# Altium PCB print.PcbDoc
Units mil, origin at the board's own origin, x right, y up, seen from the top; angles counter-clockwise.
Board outline 6000 x 4000 mil, 2 copper layers (Top Layer, Bottom Layer); 58 components, 0 nets, 188 pads, 0 vias.
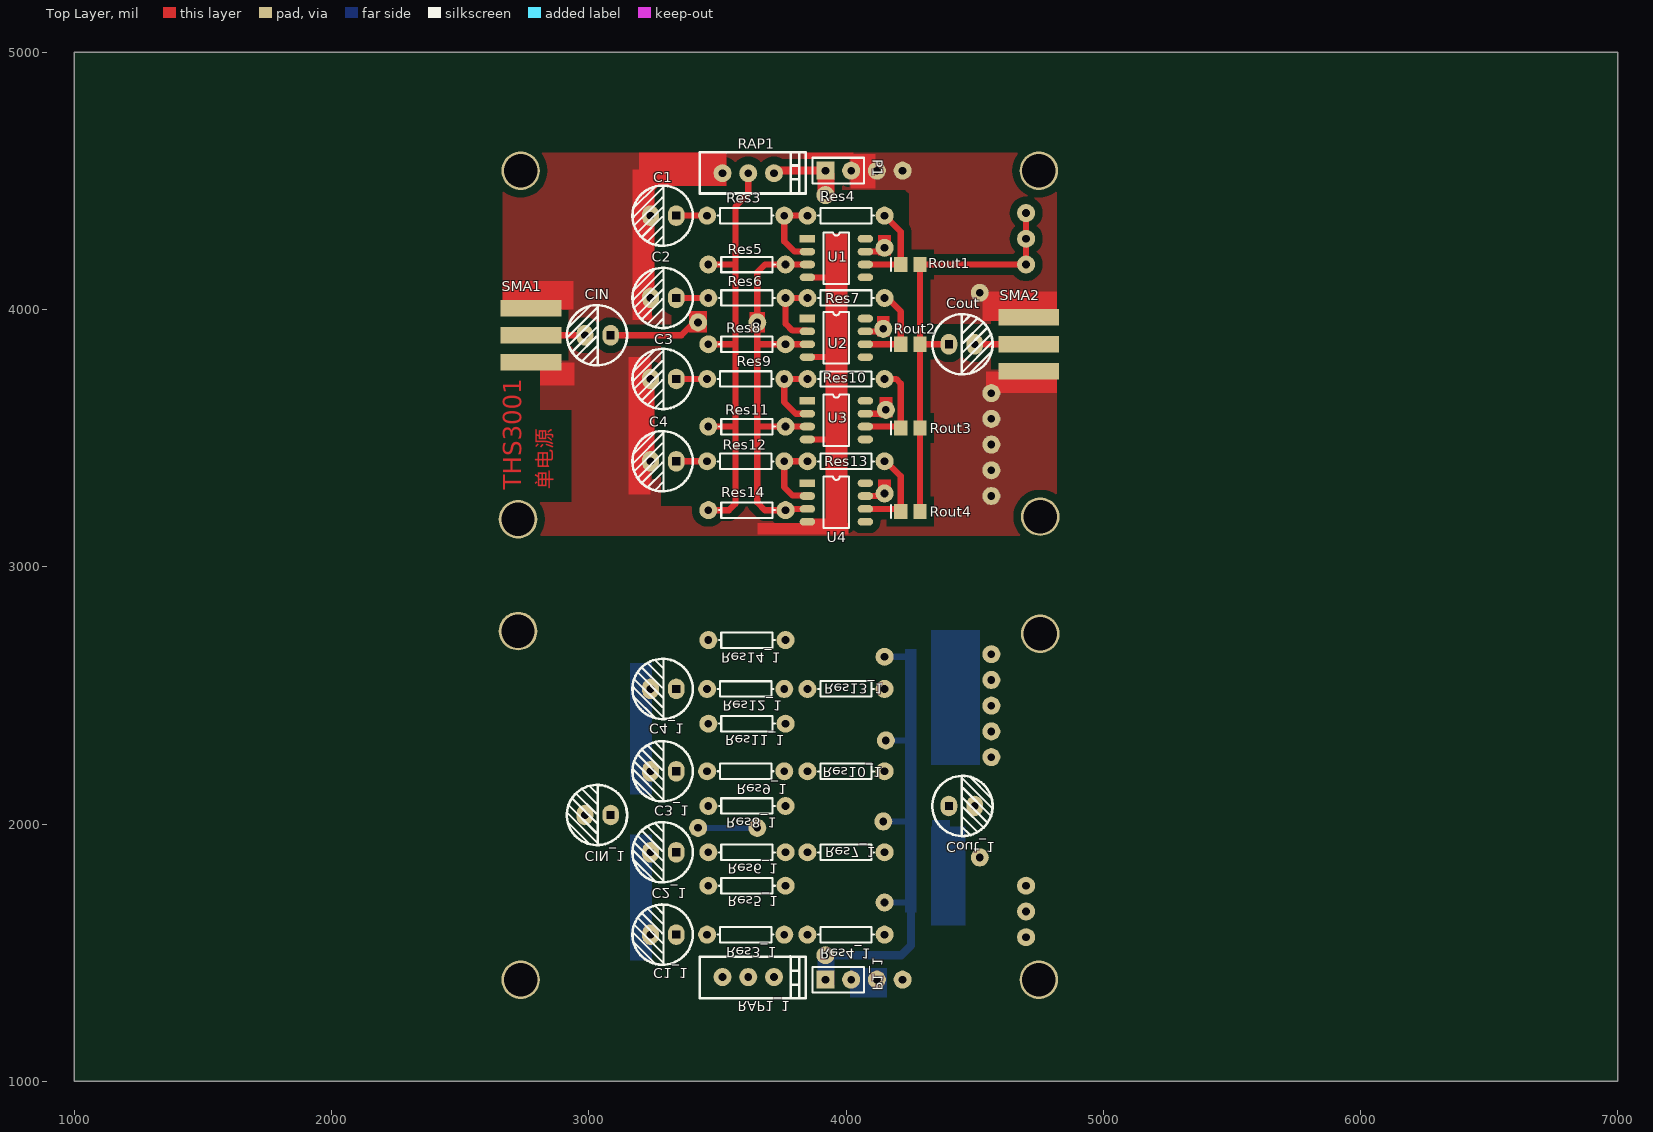
[diagram p0: Top Layer view]
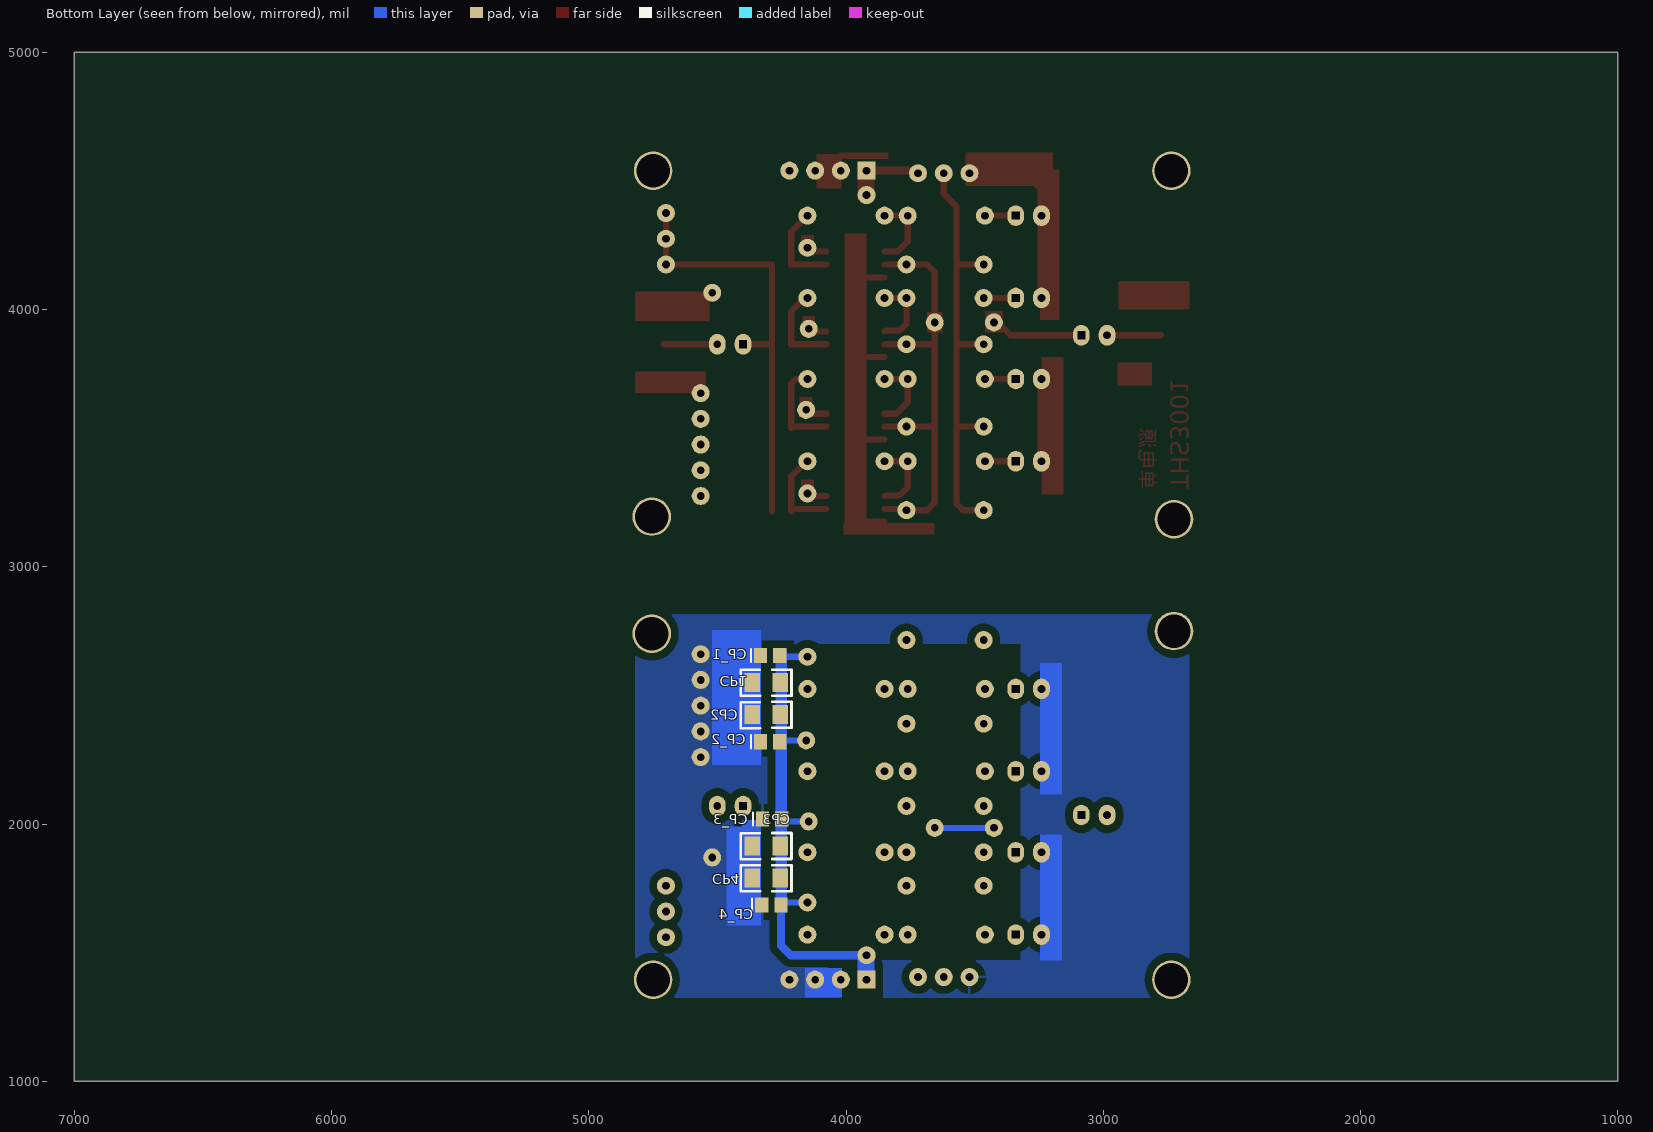
[diagram p1: Bottom Layer view, seen from below]

## Layer stack, top to bottom
Top Layer: signal copper 1.4
Dielectric: dielectric 12.6, FR-4, Dk 4.8
Bottom Layer: signal copper 1.4

## Board outline
1000,1000 7000,1000 7000,5000 1000,5000

## Design rules (kind name [scope] priority, off if disabled: settings)
Clearance [All] p1: gap=10
PolygonConnect [All] p1: connectstyle=Relief reliefconductorwidth=10 reliefentries=4 polygonreliefangle="90 Angle"
RoutingVias [All] p1: holewidth=28 width=50 viastyle="Through Hole" minholewidth=28 minwidth=50 maxholewidth=28 maxwidth=50
SilkscreenOverComponentPads [All] p1: minsilkscreentomaskgap=10
SolderMaskExpansion [All] p1: expansion=4
TestPointUsage [All] p1: valid=0 allowmultiple=FALSE
Testpoint [All] p1: side=15 testpointundercomponent=TRUE minsize=40 maxsize=100 preferedsize=60 minholesize=0 maxholesize=40 preferedholesize=32 testpointgrid=1 style=1023 order=0123456789
Width [All] p1: maxlimit=10 minlimit=10 preferedwidth=10
23 further rules are at their usual default settings.

## Components (designator, comment, footprint, x,y, rotation, side; value= is the part's Value field where it differs from the comment)
C1 "Cap Pol1" CAP1 3340,4365 r180 top
C1_1 "Cap Pol1" CAP1 3340,1570 r180 top (schematic designator C1)
C2 "Cap Pol1" CAP1 3340,4045 r180 top
C2_1 "Cap Pol1" CAP1 3340,1890 r180 top (schematic designator C2)
C3 "Cap Pol1" CAP1 3340,3730 r180 top
C3_1 "Cap Pol1" CAP1 3340,2205 r180 top (schematic designator C3)
C4 "Cap Pol1" CAP1 3340,3410 r180 top
C4_1 "Cap Pol1" CAP1 3340,2525 r180 top (schematic designator C4)
CIN "Cap Pol1" CAP1 3085,3900 r180 top
CIN_1 "Cap Pol1" CAP1 3085,2035 r180 top (schematic designator CIN)
Cout "Cap Pol1" CAP1 4400,3865 r0 top
Cout_1 "Cap Pol1" CAP1 4400,2070 r0 top (schematic designator Cout)
CP1 "Cap Pol1" CAP_BTAN 4255,2550 r0 bottom
CP2 "Cap Pol1" CAP_BTAN 4255,2425 r0 bottom
CP3 "Cap Pol1" CAP_BTAN 4255,1915 r0 bottom
CP4 "Cap Pol1" CAP_BTAN 4255,1790 r0 bottom
CP_1 "cap" C0805 4295,2655 r180 bottom
CP_2 "cap" C0805 4295,2320 r180 bottom
CP_3 "cap" C0805 4287.4,2020 r180 bottom
CP_4 "cap" C0805 4290,1685 r180 bottom
P1 "Header 2" HDR1X2 3920,4540 r0 top
P1_1 "Header 2" HDR1X2 3920,1395 r0 top (schematic designator P1)
RAP1 "RP1" dianweiqi#1 3720,4530 r270 top (schematic designator *)
RAP1_1 "RP1" dianweiqi#2 3720,1405 r90 top (schematic designator *)
Res3 "Res" R-AXIAL0.3 3760,4365 r180 top
Res3_1 "Res" R-AXIAL0.3 3760,1570 r180 top (schematic designator Res3)
Res4 "Res" AXIAL-0.3 4000,4365 r180 top
Res4_1 "Res" AXIAL-0.3 4000,1570 r180 top (schematic designator Res4)
Res5 "Res" R-AXIAL0.3 3465,4175 r0 top
Res5_1 "Res" R-AXIAL0.3 3465,1760 r0 top (schematic designator Res5)
Res6 "Res" R-AXIAL0.3 3465,4045 r0 top
Res6_1 "Res" R-AXIAL0.3 3465,1890 r0 top (schematic designator Res6)
Res7 "Res" AXIAL-0.3 4000,4045 r0 top
Res7_1 "Res" AXIAL-0.3 4000,1890 r0 top (schematic designator Res7)
Res8 "Res" R-AXIAL0.3 3465,3865 r0 top
Res8_1 "Res" R-AXIAL0.3 3465,2070 r0 top (schematic designator Res8)
Res9 "Res" R-AXIAL0.3 3460,3730 r0 top
Res9_1 "Res" R-AXIAL0.3 3460,2205 r0 top (schematic designator Res9)
Res10 "Res" AXIAL-0.3 4000,3730 r0 top
Res10_1 "Res" AXIAL-0.3 4000,2205 r0 top (schematic designator Res10)
Res11 "Res" R-AXIAL0.3 3465,3545 r0 top
Res11_1 "Res" R-AXIAL0.3 3465,2390 r0 top (schematic designator Res11)
Res12 "Res" R-AXIAL0.3 3460,3410 r0 top
Res12_1 "Res" R-AXIAL0.3 3460,2525 r0 top (schematic designator Res12)
Res13 "Res" AXIAL-0.3 4000,3410 r0 top
Res13_1 "Res" AXIAL-0.3 4000,2525 r0 top (schematic designator Res13)
Res14 "Res" R-AXIAL0.3 3465,3220 r0 top
Res14_1 "Res" R-AXIAL0.3 3465,2715 r0 top (schematic designator Res14)
Rout1 "Res" C0805 4250,4175 r0 top
Rout2 "Res" C0805 4250,3865 r0 top
Rout3 "Res" C0805 4250,3540 r0 top
Rout4 "Res" C0805 4250,3215 r0 top
SMA1 "SMA-xie" sma-xie 2675,3985 r0 top
SMA2 "SMA-xie" sma-xie 4610,3950 r0 top
U1 "THS3091" SOIC-8D 3850,4275 r0 top
U2 "THS3091" SOIC-8D 3850,3965 r0 top
U3 "THS3091" SOIC-8D 3850,3645 r0 top
U4 "THS3091" SOIC-8D 3850,3325 r0 top

## Footprints (in the part's own frame and the unit in brackets; to place one, negate y for a bottom-side part, rotate by r counter-clockwise, add the part's x,y. Pads: shape width x height; smd on the part's side, far side on the other; paste and mask are expansions set on the pad)
AXIAL-0.3 [mil] "Resistor; 2 Leads"
  round 70 hole 30: 1(-150,0) 2(150,0)
  silkscreen extent -109,-30 109,30
C0805 [mm] "Chip Capacitor; Body 2.0 x 1.2 mm (LxW typ)"
  rect 1.3x1.5 smd: 1(-0.95,0) 2(0.95,0)
  silkscreen extent -1.9,-0.65 -1.9,0.65
CAP1 [mil] "占地1*2的电容或器件均可以用它"
  oval 65x80 hole 30 square: 1(0,0)
  oval 65x80 hole 30: 2(100,0)
  silkscreen extent -64,-117 170,117
CAP_BTAN [mil]
  rect 60x74 smd: 1(0,0) 2(110,0)
  silkscreen extent -43,-50 154,52
dianweiqi#1 [mil]
  round 70 hole 30: 1(0,0) 2(0,-100) 3(0,-200)
  silkscreen extent -82,-288 80,124
dianweiqi#2 [mil]
  round 70 hole 30: 1(0,0) 2(0,100) 3(0,200)
  silkscreen extent -82,-124 80,288
HDR1X2 [mil] "Connector; Header; 2 Position"
  rect 70x70 hole 30: 1(0,0)
  round 70 hole 30: 2(100,0)
  silkscreen extent -50,-50 150,50
R-AXIAL0.3 [mil]
  round 70 hole 30: 1(0,0) 2(300,0)
  silkscreen extent 41,-30 259,30
sma-xie [mm] "SMA接头外螺内孔，斜四角"
  rect 6x1.6 smd: 1(2.54,0.508) 2(2.54,-2.159) 3(2.54,-4.826)
SOIC-8D [mm] "封装代码为D"
  rect 1.52x0.76 smd: 1(0,0)
  oval 1.52x0.76 smd: 2(0,-1.27) 3(0,-2.54) 4(0,-3.81) 5(5.72,-3.81) 6(5.72,-2.54) 7(5.72,-1.27) 8(5.72,0)
  silkscreen extent 1.59,-4.44 4.13,0.64

## Part data
C1 C1_1 C2 C2_1 C3 C3_1 C4 C4_1 CIN CIN_1 Cout Cout_1 CP1 CP2 CP3 CP4: "Polarized Capacitor (Radial)"
CP_1 CP_2 CP_3 CP_4: "贴片电容"
P1 P1_1: "Header, 2-Pin"
Res3 Res3_1 Res4 Res4_1 Res5 Res5_1 Res6 Res6_1 Res7 Res7_1 Res8 Res8_1 Res9 Res9_1 Res10 Res10_1 Res11 Res11_1 Res12 Res12_1 Res13 Res13_1 Res14 Res14_1 Rout1 Rout2 Rout3 Rout4: "适用于0805的贴片元件，包括磁珠"
SMA1 SMA2: "外螺内孔，斜角，或直四角斜着放置"
U1 U2 U3 U4: "单路高压低失真电流反馈 运放 ,通常申请DDA，即下方带有热焊盘的，有利于散热"

## Free pads (board coordinates)
  round 70 hole 30: 1(4145,2010) 1(4145,3925) 2(4150,1695) 2(4150,4240) 3(4155,2325) 3(4155,3610) 4(4150,2650) 4(4150,3285) 5(3425,1985) 5(3425,3950) 6(3655,1985) 6(3655,3950) 8(3920,1490) 8(3920,4445) 14(4700,1760) 14(4700,4175) 15(4700,1660) 15(4700,4275) 16(4700,1560) 16(4700,4375) 17(4565,2260) 17(4565,3675) 18(4565,2360) 18(4565,3575) 19(4565,2460) 19(4565,3475) 20(4565,2560) 20(4565,3375) 21(4565,2660) 21(4565,3275) 22(4520,1870) 22(4520,4065) 23(4120,1395) 23(4120,4540) 24(4220,1395) 24(4220,4540)
  round 150 hole 130: 7(2725,2750) 7(2725,3185) 7(2735,1395) 7(2735,4540) 7(4750,1395) 7(4750,4540) 7(4755,2740) 7(4755,3195)

## Nets (pads, with @x,y where several pads share a name; then routed paths per layer and width w, separated by ;. In a path a pad name is that pad's centre, name@x,y a point inside that pad or via, vN(x,y) a via of type N, cw(c..) or ccw(c..) an arc to the next point about the centre after c; other vN are vias at no path point)
pads on no net: C1.1 C1.2 C1_1.1 C1_1.2 C2.1 C2.2 C2_1.1 C2_1.2 C3.1 C3.2 C3_1.1 C3_1.2 C4.1 C4.2 C4_1.1 C4_1.2 CIN.1 CIN.2 CIN_1.1 CIN_1.2 Cout.1 Cout.2 Cout_1.1 Cout_1.2 CP1.1 CP1.2 CP2.1 CP2.2 CP3.1 CP3.2 CP4.1 CP4.2 CP_1.1 CP_1.2 CP_2.1 CP_2.2 CP_3.1 CP_3.2 CP_4.1 CP_4.2 P1.1 P1.2 P1_1.1 P1_1.2 RAP1.1 RAP1.2 RAP1.3 RAP1_1.1 RAP1_1.2 RAP1_1.3 Res3.1 Res3.2 Res3_1.1 Res3_1.2 Res4.1 Res4.2 Res4_1.1 Res4_1.2 Res5.1 Res5.2 Res5_1.1 Res5_1.2 Res6.1 Res6.2 Res6_1.1 Res6_1.2 Res7.1 Res7.2 Res7_1.1 Res7_1.2 Res8.1 Res8.2 Res8_1.1 Res8_1.2 Res9.1 Res9.2 Res9_1.1 Res9_1.2 Res10.1 Res10.2 Res10_1.1 Res10_1.2 Res11.1 Res11.2 Res11_1.1 Res11_1.2 Res12.1 Res12.2 Res12_1.1 Res12_1.2 Res13.1 Res13.2 Res13_1.1 Res13_1.2 Res14.1 Res14.2 Res14_1.1 Res14_1.2 Rout1.1 Rout1.2 Rout2.1 Rout2.2 Rout3.1 Rout3.2 Rout4.1 Rout4.2 SMA1.1 SMA1.2 SMA1.3 SMA2.1 SMA2.2 SMA2.3 U1.1 U1.2 U1.3 U1.4 U1.5 U1.6 U1.7 U1.8 U2.1 U2.2 U2.3 U2.4 U2.5 U2.6 U2.7 U2.8 U3.1 U3.2 U3.3 U3.4 U3.5 U3.6 U3.7 U3.8 U4.1 U4.2 U4.3 U4.4 U4.5 U4.6 U4.7 U4.8
copper on no net: | length 12227.1
  Top Layer w24: 2775,3900 2985,3900 ; 3085,3900 3360,3900 3410,3950 3425,3950 ; 3340,3410 3460,3410 ; 3340,3730 3460,3730 ; 3340,4045 3465,4045 ; 3340,4365 3460,4365 ; 3465,3220 3545,3220 3570,3245 3570,3545 ; 3465,3545 3570,3545 ; 3465,3865 3565,3865 ; 3465,4175 3570,4175 ; 3570,4125 3570,4400 3620,4450 3620,4530 ; 3570,4160 3570,3545 ; 3655,3545 3765,3545 ; 3670,3865 3765,3865 3850,3865 ; 3760,3550 3765,3545 ; 3765,3220 3685,3220 3655,3250 3655,3530 3655,4145 3685,4175 3765,4175 3850,4175 ; 3770,3225 3850,3225 ; 3850,3175 3960,3175 ; 3850,3275 3848,3277 3793,3277 3760,3310 3760,3410 3850,3410 ; 3850,3495 3940,3495 ; 3850,3545 3765,3545 ; 3850,3595 3805,3595 3760,3640 3760,3730 3850,3730 ; 3850,3815 3955,3815 ; 3850,3915 3847,3918 3792,3918 3765,3945 3765,4045 3850,4045 ; 3850,4125 3950,4125 ; 3850,4225 3800,4225 3760,4265 3760,4365 3850,4365 ; 4075.2,3225 4202.6,3225 4212.6,3215 4212.6,3352.4 4155,3410 4150,3410 ; 4075.2,3275 4140,3275 ; 4075.2,3545 4207.6,3545 ; 4075.2,3595 4140,3595 4155,3610 ; 4075.2,3865 4212.6,3865 4212.6,3992.4 4160,4045 4150,4045 ; 4075.2,3915 4135,3915 4145,3925 ; 4075.2,4175 4212.6,4175 4212.6,4302.4 4150,4365 ; 4075.2,4225 4135,4225 4150,4240 ; 4150,3730 4195,3730 4212.6,3712.4 4212.6,3540 ; 4287.4,3215 4287.4,3540 4287.4,3865 ; 4400,3865 4287.4,3865 ; 4500,3865 4710,3865 ; 4700,4375 4700,4275 4700,4175 4287.4,4175 4287.4,3865
  Top Layer w32: 3240,3410 3240,3730 ; 3240,4045 3240,4365 3240,4470 3300,4530 3520,4530 ; 3720,4530 3730,4540 3920,4540 3920,4445
  Bottom Layer w24: 3425,1985 3655,1985 ; 4145,2010 4240,2010 4250,2020 ; 4150,1695 4242.6,1695 4252.6,1685 ; 4150,2650 4252.6,2650 ; 4155,2325 4252.6,2325 4257.6,2320
  Bottom Layer w32: 3920,1490 4215,1490 4252.6,1527.6 4252.6,1685

## Polygon pours and split planes (outlines as drawn)
no net on Top Layer "Top Layer-No Net" (solid, remove dead copper, pour order 1000): 2630,3910 3280,3910 3280,3395 3280,3235 4295,3235 4300,3230 4329.76,3259.76 4329.76,3930.52 4849.48,3930.52 4855,3925 4855,3085 2635,3085 2630,3090 2630,3900
no net on Top Layer "Top Layer-No Net" (solid, remove dead copper, pour order 1001): 2630,3895 3305,3895 3310,3900 3320,3910 3320,4465 4230,4465 4235,4460 4245,4450 4245,3945 4855,3945 4855,4645 2630,4645 2640,4635 2640,3900
no net on Bottom Layer "Top Layer-No Net" (solid, remove dead copper, pour order 1002): 2630,1290 2630,2850 4855,2850 4855,1290 2625,1290 2620,1295

## Other copper
Top Layer:
  rectangle: 3835,4585 4030,4609.7
  rectangle: 3920,3160 4005,4295
  rectangle: 4125,4210 4175,4290
  rectangle: 4120,3895 4170,3975
  rectangle: 4130,3580 4180,3660
  rectangle: 4125,3260 4175,3340
  rectangle: 3890,4425 3955,4530
  rectangle: 3625,3910 3685,3990
  rectangle: 3390,3910 3460,3995
  rectangle: 4545,3675 4820,3760
  rectangle: 2810,3705 2945,3795
  rectangle: 2665,4000 2940,4110
  rectangle: 3170,3960 3245,4545
  rectangle: 3195,4480 3535,4610
  rectangle: 4018.38,4470 4115,4605.16
  rectangle: 4530,3955 4820,4070
  rectangle: 3655,3125 4010,3170
  rectangle: 3155,3280 3240,3815
  text "THS3001" at 2760,3300 h120 r90
  text "单电源" at 2875,3300 h100 r90
Bottom Layer:
  rectangle: 4230,1655 4275,2680
  rectangle: 4345,2290 4400,2685
  rectangle: 4335,1655 4405,2015
  rectangle: 3890,1375 3955,1500
  rectangle: 4330,1605 4465.11,1990
  rectangle: 4330,2230 4520,2755
  rectangle: 3160,2115 3245,2625
  rectangle: 3160,1470 3245,1959.81
  rectangle: 4015,1325 4160,1440
  pour cut-out: 3320,1470 3320,2695 3315,2700 4255,2700 4255,1460 4245,1470